# Altium PCB CH340T9R-R0.PcbDoc
Units mil, origin at the board's own origin, x right, y up, seen from the top; angles counter-clockwise.
Board outline 1551.27 x 575.04 mil, 2 copper layers (Top Layer, Bottom Layer); 14 components, 31 nets, 87 pads, 75 vias.
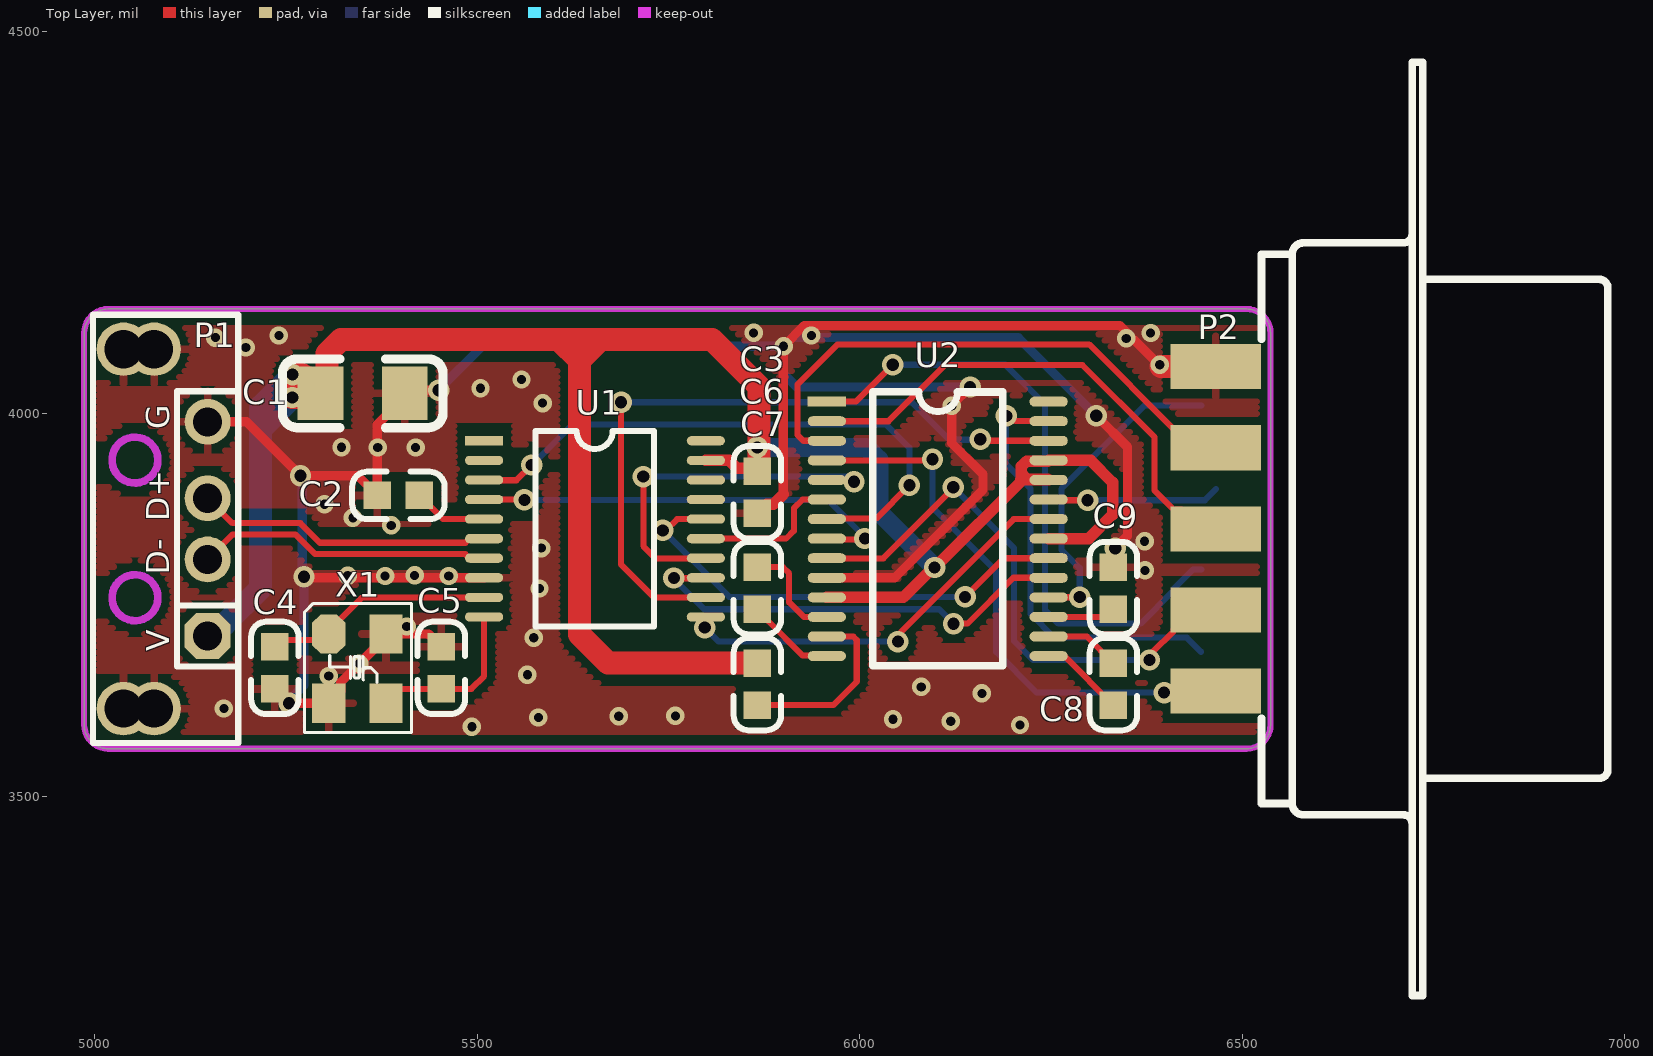
[diagram p0: Top Layer view]
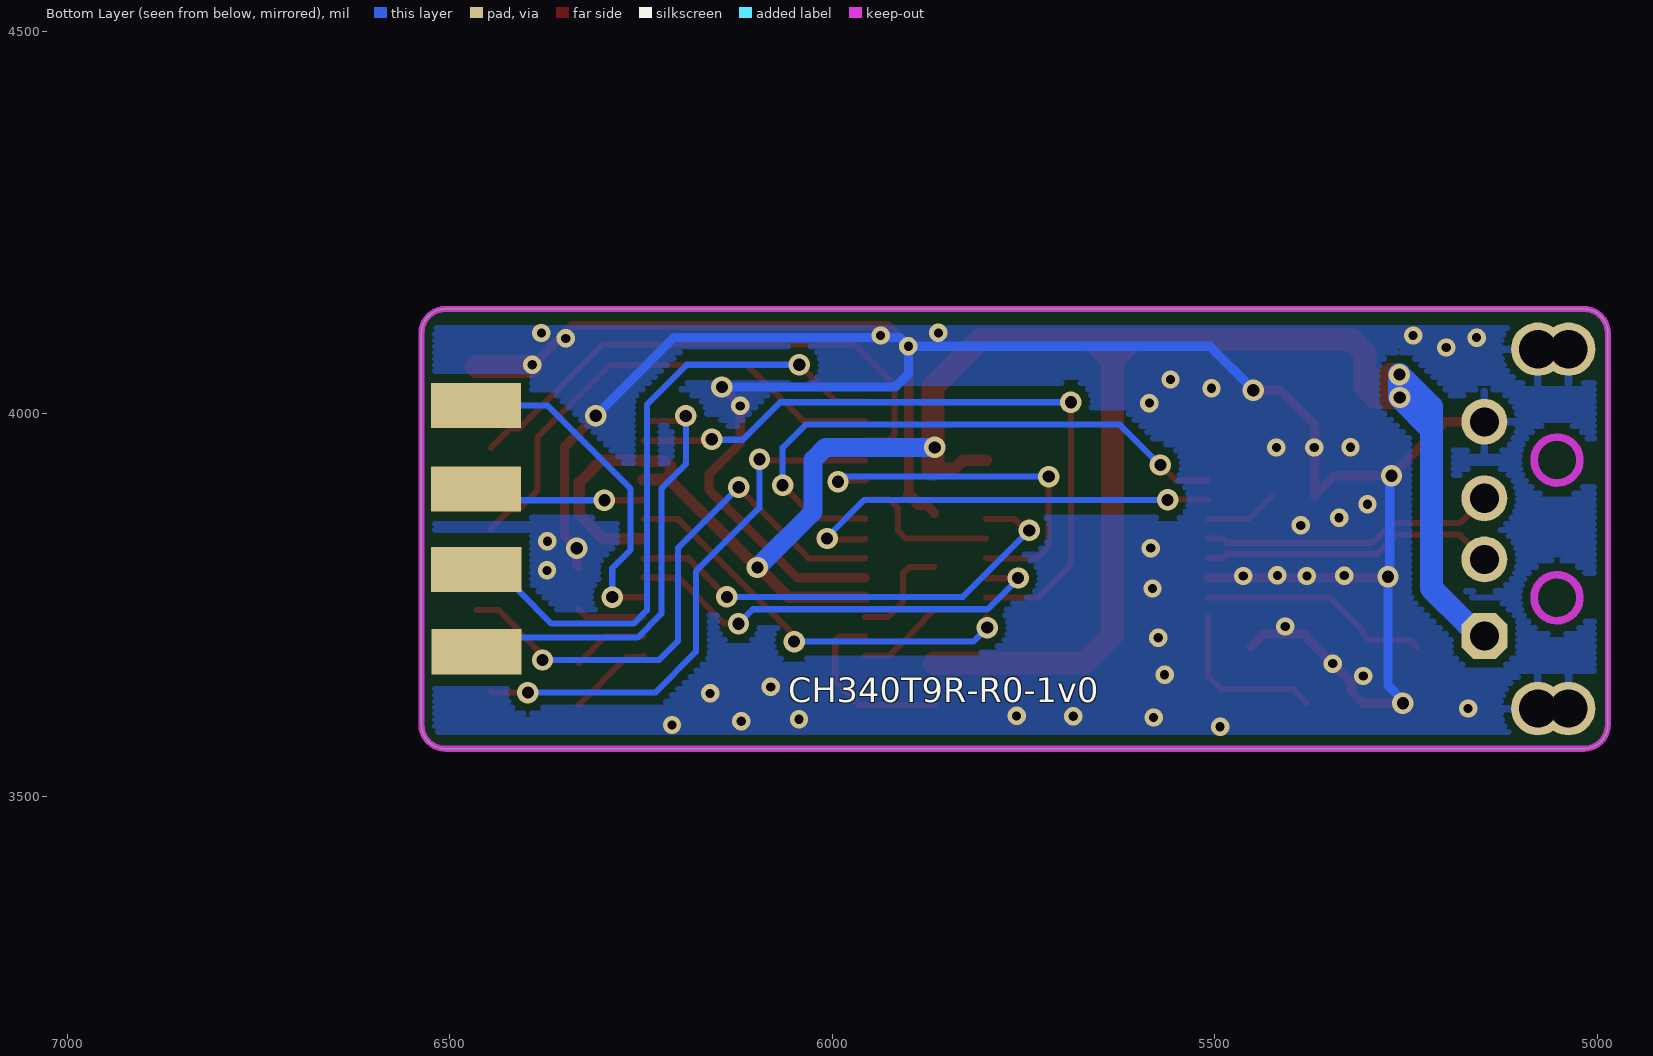
[diagram p1: Bottom Layer view, seen from below]

## Layer stack, top to bottom
Top Solder: solder mask 0.4, Solder Resist, Dk 3.5
Top Layer: signal copper 1.4
Dielectric 1: dielectric 12.6, FR-4, Dk 4.8
Bottom Layer: signal copper 1.4
Bottom Solder: solder mask 0.4, Solder Resist, Dk 3.5

## Board outline
4986,3593.5 ccw(c5017.5,3593.5) 5017.5,3562 6505.78,3562 ccw(c6505.78,3593.5) 6537.27,3593.5 6537.27,4105.54 ccw(c6505.78,4105.54) 6505.78,4137.04 5017.5,4137.04 ccw(c5017.5,4105.54) 4986,4105.54

## Design rules (kind name [scope] priority, off if disabled: settings)
Clearance Clearance_1 [InPolygon] p1: gap=10 ignorepadtopadclearanceinfootprint=FALSE
Clearance [All] p2: gap=6 ignorepadtopadclearanceinfootprint=FALSE
ComponentClearance [All] p1 off: gap=10 collisioncheckmode=3 verticalgap=10 showdistances=FALSE
DiffPairsRouting [All] p1: maxlimit=10 minlimit=7 mostfreqgap=8 toplayer_minwidth=6 toplayer_maxwidth=15 toplayer_prefwidth=8 bottomlayer_minwidth=6 bottomlayer_maxwidth=15 bottomlayer_prefwidth=8 maxuncoupledlength=500
MinimumSolderMaskSliver [All] p1 off: minsoldermaskwidth=10
PolygonConnect PolygonConnect_1 [IsVia] p1: connectstyle=Direct reliefconductorwidth=10 reliefentries=4 polygonreliefangle="90 Angle" airgapwidth=10
PolygonConnect [All] p2: connectstyle=Relief reliefconductorwidth=10 reliefentries=4 polygonreliefangle="90 Angle" airgapwidth=10
RoutingVias [All] p1: holewidth=16 width=28 viastyle="Through Hole" minholewidth=12 minwidth=24 maxholewidth=28 maxwidth=50
SilkToSilkClearance [All] p1 off: silktosilkclearance=10
SilkToSolderMaskClearance [IsPad] p1 off: minsilkscreentomaskgap=10 clearancetoexposedcopper=TRUE
SolderMaskExpansion [All] p1: expansion=4 istentingtop=FALSE
Width [All] p1: maxlimit=100 minlimit=6 preferedwidth=10
25 further rules are at their usual default settings.

## Classes and differential pairs
differential pair NewDifferentialPair1: +UD+ -UD-

## Components (designator, comment, footprint, x,y, rotation, side; value= is the part's Value field where it differs from the comment)
C1 "10uF" 3216_C 5295.21,4026.82 r180 top
C2 "0.1uF" 0603_C 5424.33,3893.24 r180 top
C3 "0.1uF" 0603_C 5866.25,3924.83 r270 top
C4 "33p" 0603_C 5235.41,3695.17 r270 top
C5 "33p" 0603_C 5453.14,3640.19 r90 top
C6 "0.1uF" 0603_C 5866.25,3799.43 r270 top
C7 "0.1uF" 0603_C 5866.25,3674.02 r270 top
C8 "0.1uF" 0603_C 6331.73,3674.02 r270 top
C9 "0.1uF" 0603_C 6331.73,3744.44 r90 top
P1 "USB" USBAM 5147.43,3709.52 r90 top
P2 "DB9" DB9-PAD-M 6465.11,3637.12 r180 top
U1 "CH340T" SSOP20 5508.91,3964.68 r270 top
U2 "MAX213/ADM213/SP213" SSOP28 5957.09,4015.86 r0 top
X1 "12MHz" XT3225 5305.82,3712.12 r270 top

## Footprints (in the part's own frame and the unit in brackets; to place one, negate y for a bottom-side part, rotate by r counter-clockwise, add the part's x,y. Pads: shape width x height; smd on the part's side, far side on the other; paste and mask are expansions set on the pad)
0603_C [mil]
  rect 36x36 smd: 1(0,0) 2(55,0)
  silkscreen extent -33,-31 88,31
3216_C [mil]
  rect 60x70 smd: 1(0,0) 2(-110,0)
  silkscreen extent -160,-45 50,45
DB9-PAD-M [mm]
  rect 3x1.5 smd: 1(-0.01,-0.005) 2(-0.01,-2.7) 3(-0.01,-5.395) 4(-0.01,-8.09) 5(-0.01,-10.785)
  rect 3x1.5 smd far side: 6(-0.002,-1.315) 7(-0.012,-4.05) 8(-0.02,-6.717) 9(-0.02,-9.493)
  silkscreen extent -13.03,-20.89 -1.53,10.11
SSOP20 [mil]
  rect 12x50 smd: 1(0,0)
  oval 12x50 smd: 2(25.6,0) 3(51.2,0) 4(76.8,0) 5(102.4,0) 6(128,0) 7(153.5,0) 8(179.1,0) 9(204.7,0) 10(230.3,0) 11(230.3,290) 12(204.7,290) 13(179.1,290) 14(153.5,290) 15(128,290) 16(102.4,290) 17(76.8,290) 18(51.2,290) 19(25.6,290) 20(0,290)
  silkscreen extent -13,67 243,222
SSOP28 [mil]
  rect 50x13 smd: 1(0,0)
  oval 50x13 smd: 2(0,-25.59) 3(0,-51.18) 4(0,-76.77) 5(0,-102.36) 6(0,-127.95) 7(0,-153.55) 8(0,-179.14) 9(0,-204.73) 10(0,-230.32) 11(0,-255.91) 12(0,-281.5) 13(0,-307.09) 14(0,-332.68) 15(290,-332.68) 16(290,-307.09) 17(290,-281.5) 18(290,-255.91) 19(290,-230.32) 20(290,-204.73) 21(290,-179.14) 22(290,-153.55) 23(290,-127.95) 24(290,-102.36) 25(290,-76.77) 26(290,-51.18) 27(290,-25.59) 28(290,0)
  silkscreen extent 60,-345 230,13
USBAM [mil]
  round 70 hole 50: 0(-95,70) 0(-95,110) 0(375,70) 0(375,110)
  oct 60x60 hole 38: 1(0,0)
  round 60 hole 38: 2(100,0) 3(180,0) 4(280,0)
  Keep-Out Layer circle w10: c50,95 r30
  Keep-Out Layer circle w10: c230,95 r30
  silkscreen extent -140,-40 420,150
XT3225 [mm]
  oct 1.3x1.1 smd: 1(0,0)
  rect 1.3x1.1 smd: 2(2.3,0) 3(2.3,1.9) 4(0,1.9)
  silkscreen extent -1.02,-0.8 3.27,2.74

## Part data
C1 C2 C3 C4 C5 C6 C7 C8 C9: library part CAP, "Capacitor"
U1: "USB to TTL Serial / UART,  USB to IrDA"
U2: library part MAX213
X1: library part CRYSTAL, "Crystal"

## Via types
v1: diameter 24, hole 12, Top Layer to Bottom Layer, 42 vias
v2: diameter 28, hole 16, Top Layer to Bottom Layer, 33 vias

## Nets (pads, with @x,y where several pads share a name; then routed paths per layer and width w, separated by ;. In a path a pad name is that pad's centre, name@x,y a point inside that pad or via, vN(x,y) a via of type N, cw(c..) or ccw(c..) an arc to the next point about the centre after c; other vN are vias at no path point)
ACT: U1.2
CTS: U1.11 U2.22 | length 543.2
  Top Layer w8: v2(5797.38,3720.48) 5797.38,3732.84 U1.11 ; v2(6049.98,3702.19) 6053.81,3706.01 6053.81,3714.57 6201.55,3862.31 U2.22
  Bottom Layer w8: v2(5797.38,3720.48) 5815.67,3702.19 v2(6049.98,3702.19)
DCD: U1.14 U2.5 | length 498.3
  Top Layer w8: v2(5717.12,3917.89) 5717.12,3826.91 5733.47,3810.56 5798.29,3810.56 U1.14 ; U2.5@5955.62,3913.94 5957.02,3912.54 5991.09,3912.54 v2(5992.63,3911)
  Bottom Layer w8: v2(5717.12,3917.89) 5989.11,3917.89 5989.11,3914.51 v2(5992.63,3911)
DSR: U1.12 U2.26 | length 921.4
  Top Layer w8: v2(5688,4015) 5688,3802.85 5730.88,3759.98 U1.12 ; v2(6157.82,3966.82) 6159.95,3964.68 U2.26
  Bottom Layer w8: v2(5688,4015) 6068.38,4015 6117.38,3966 6157,3966 v2(6157.82,3966.82)
DTR: U1.15 U2.6 | length 196.7
  Top Layer w8: U1.15 5903.68,3836.68 5913.97,3846.97 5913.97,3876.47 5925.4,3887.91 U2.6
GND: C1.2 C2.2 C3.2 C4.2 C5.2 C9.2 P1.0 P1.4 P2.5 U1.8 U2.10 X1.2 X1.4 | length 3941.5
  Top Layer w12: P1.4 5198.32,3989.52 v2(5268.89,3918.94) 5343.62,3918.94 C2.2 5369.33,3985.95 5414.04,4030.65 v2(5449.66,4030.65) ; v2(5254.02,3621.56) X1.2 5321.47,3637.22 5321.47,3649.03 5380.62,3708.18 X1.4 5436.21,3712.12 C5.2 ; v2(5273.49,3786.82) 5274.73,3785.58 U1.8 ; C3.2 C3.2@5878.25,3881.83 ; 5899.98,3894.49 v1@5899.98,4087.32 ; v1(5900.58,4088.37) 5927.76,4115.55 6340.02,4115.55 v1@6352.83,4102.74 ; U2.10 6045.94,3785.54 6161.26,3900.86 6161.26,3920.9 6120.5,3961.66 6120.5,4011.1 v2(6144.43,4035.02) ; v2(6309.48,3997.31) 6350.19,3956.6 6350.19,3840.39 6334.25,3824.44 v2(6334.25,3824.19) 6334.25,3801.96 C9.2 ; v1@6352.53,4102.44 6352.53,4097.85 6354.15,4096.22 6359.34,4096.22 v1@6393.84,4061.72
  Top Layer w15: C3.2@5878.25,3881.83 5887.33,3881.83 5899.98,3894.49
  Top Layer w30: v1@6393.84,4061.72 P2.5
  Bottom Layer w12: v2(5254.02,3621.56) 5254.02,3625.51 5273.49,3644.98 v2(5273.49,3786.82) 5271.19,3789.12 5271.19,3916.65 v2(5268.89,3918.94) ; v2(5449.66,4030.65) 5449.66,4031.74 5506.3,4088.37 v1(5900.58,4088.37) ; v2(6144.43,4035.02) 5917.53,4035.02 5900.58,4051.96 v1(5900.58,4088.37) ; v2(6309.48,3997.31) 6207.26,4099.53 5911.85,4099.53 5900.69,4088.37 v1(5900.58,4088.37)
  other v1: 5493,3590.8 6209.66,3593.1 6119.12,3597.92 6043.59,3600.6 5579.93,3602.89 5685,3604.4 5759.08,3604.94 5168.75,3614.63 6159.84,3634.35 6080.55,3642.92 5305.82,3657.15 5565.57,3658.83 5345.71,3673.27 5573.88,3707.2 5407.86,3721.91 5581.44,3771.45 5330.57,3788.39 5379.48,3787.86 5462.77,3787.86 5418.08,3788.66 6373.11,3795.17 5583.71,3824.36 6372.62,3833.43 5387.54,3854.11 5337.33,3864 5300.34,3881.68 5322.43,3956.26 5369.82,3955.9 5419.37,3955.9 6120.5,4010.35 5585.49,4013.92 5504.26,4033.44 5557.79,4044.77 6392.45,4064 5197.27,4086.66 6348.61,4098.52 5157.62,4099.57 5240.6,4102.34 5936.91,4102.41 5861.31,4105.72 6380.43,4105.69
NetC2_1: C2.1 U1.5 | length 97.4
  Top Layer w8: C2.1 5455.29,3862.28 U1.5
NetC4_1: C4.1 U1.9 X1.1 | length 302.7
  Top Layer w8: C4.1 5244.33,3704.09 5297.8,3704.09 X1.1 5305.82,3716.05 5349.74,3759.98 U1.9
NetC5_1: C5.1 U1.10 X1.3 | length 220.9
  Top Layer w8: X1.3 5380.62,3622.54 5398.27,3640.19 C5.1 5492.1,3640.19 5508.91,3657 U1.10
NetC6_1: C6.1 U2.12 | length 139.9
  Top Layer w8: C6.1 5899.71,3799.43 5907.77,3791.37 5907.77,3753.6 5927.01,3734.36 U2.12
NetC6_2: C6.2 U2.14 | length 117
  Top Layer w8: C6.2 5880.25,3730.43 5880.25,3729.05 5925.16,3684.13 5956.13,3684.13 U2.14
NetC7_2: C7.2 U2.13 | length 238.1
  Top Layer w8: C7.2 5965.49,3619.02 5996.19,3649.73 5996.19,3704.14 5991.56,3708.77 U2.13
NetC8_1: C8.1 U2.16 | length 99
  Top Layer w8: U2.16 6296.98,3708.77 C8.1
NetC8_2: C8.2 U2.15 | length 111.2
  Top Layer w8: U2.15 6248.05,3682.22 6268.53,3682.22 C8.2
NetC9_1: C9.1 U2.17 | length 88.8
  Top Layer w8: U2.17 6321.64,3734.36 C9.1
RI: U1.13 U2.19 | length 581.5
  Top Layer w8: v2@5757.11,3784.3 5757.74,3784.94 5798.27,3784.94 U1.13 ; v2(6122.73,3725.58) 6141.01,3725.58 6200.97,3785.54 U2.19
  Bottom Layer w8: v2@5757.11,3784.3 5796.93,3744.48 6103.83,3744.48 v2(6122.73,3725.58)
  other v2: 5757.11,3785.3
RS232_CTS: P2.8 U2.23 | length 225.2
  Top Layer w8: U2.23 6248,3887 v2(6298,3887)
  Bottom Layer w8: v2(6298,3887) 6451.32,3887 P2.8
RS232_DCD: P2.1 U2.4 | length 716
  Top Layer w8: U2.4 6093.88,3939.09 v2(6095.27,3940.47) ; v2(6398.1,3635.42) 6444.62,3635.42 P2.1@6446.51,3637.31
  Bottom Layer w8: v2(6095.27,3940.47) 6095.27,3877.08 6178.35,3794 6178.35,3688.6 6231.52,3635.42 v2(6398.1,3635.42)
RS232_DSR: P2.6 U2.27 | length 568.4
  Top Layer w8: v2(6191.55,3997.23) 6196.96,3997.23 6203.69,3990.5 6241.49,3990.5 U2.27@6241.83,3990.17
  Bottom Layer w8: v2(6191.55,3997.23) 6191.55,3934.25 6223.53,3902.26 6223.53,3738.59 6254.71,3707.41 6427.69,3707.41 P2.6@6446.21,3688.89
RS232_DTR: P2.4 U2.3 | length 712.9
  Top Layer w8: U2.3 5926.37,3964.68 5918.68,3972.37 5918.68,4038.03 5971.36,4090.71 6300.04,4090.71 6409.6,3981.15 6420.98,3981.15 P2.4@6446.51,3955.62
RS232_RI: P2.9 U2.18 | length 420.6
  Top Layer w8: U2.18 6247.26,3760.12 6287.61,3760.12 v2(6287.79,3760.3)
  Bottom Layer w8: v2(6287.79,3760.3) 6287.79,3798.18 6263.77,3822.2 6263.77,3901.85 6372.76,4010.84 P2.9@6446.9,4010.84
RS232_RTS: P2.7 U2.1 | length 837.9
  Top Layer w8: U2.1 5994.82,4015.86 v2(6043.13,4064.17)
  Bottom Layer w8: v2(6043.13,4064.17) 6190.37,4064.17 6242.52,4012.02 6242.52,3743.05 6259.91,3725.67 6367.23,3725.67 6410.55,3769 6410.55,3771.04 6436.08,3796.57 P2.7@6446.61,3796.57
RS232_RXD: P2.2 U2.9 | length 744.5
  Top Layer w8: U2.9 5957.38,3810.84 6030.77,3810.84 6122.52,3902.59 v2(6122.52,3903.78) ; v2(6379,3678) 6382.83,3681.83 6382.83,3688.16 6410.45,3715.79 6410.45,3717.89 6435.98,3743.42 P2.2
  Bottom Layer w8: v2(6122.52,3903.78) 6201.56,3824.74 6201.56,3703.23 6226.79,3678 v2(6379,3678)
RS232_TXD: P2.3 U2.2 | length 649.4
  Top Layer w8: U2.2 6037.61,3990.27 6110.95,4063.61 6291.37,4063.61 6385.54,3969.44 6385.54,3899.64 6410.13,3875.05 6420.98,3875.05 P2.3@6446.51,3849.52
RTS: U1.16 U2.20 | length 623.9
  Top Layer w8: v2(5742.59,3847.49) 5746.46,3847.49 5761.25,3862.28 U1.16 ; v2(6137.82,3760.6) 6188.35,3811.13 U2.20
  Bottom Layer w8: v2(5742.59,3847.49) 5829.48,3760.6 v2(6137.82,3760.6)
RXD: U1.4 U2.8 | length 569.6
  Top Layer w8: U1.4 5561.16,3887.88 v2(5561.61,3887.43) ; U2.8 5958.03,3835.78 6003.74,3835.78 v2@6006.84,3838.88
  Bottom Layer w8: v2(5561.61,3887.43) 5958.29,3887.43 v2@6006.84,3838.88
  other v2: 6006.84,3836.88
TNOW: U1.17
TXD: U1.3 U2.7 | length 774.5
  Top Layer w8: U1.3 5509.3,3913.08 5551.11,3913.08 v2(5571,3932.97) ; U2.7 5957.65,3862.88 6021.48,3862.88 v2(6065.06,3906.46)
  Bottom Layer w8: v2(5571,3932.97) 5623.91,3985.89 6034.89,3985.89 6065.06,3955.71 v2(6065.06,3906.46)
UD+: P1.3 U1.6 | length 387.7
  Top Layer w8: P1.3 5179.93,3857.02 5268.59,3857.02 5294.18,3831.43 5484.39,3831.43 5489.64,3836.68 U1.6
UD-: P1.2 U1.7 | length 387.7
  Top Layer w8: P1.2 5179.93,3842.02 5262.37,3842.02 5287.97,3816.43 5484.39,3816.43 5489.64,3811.18 U1.7
VCC: C1.1 C3.1 C7.1 P1.1 U1.19 U2.11 U2.21 U2.24 U2.25 | length 3167.4
  Top Layer w15: U1.19 5829.26,3939.08 5839.84,3928.5 C3.1@5871.58,3928.5 ; U2.11 6057.19,3759.95 6096.24,3799 v2(6098,3799) ; v2@6098.76,3801.89 6101.24,3801.89 6212.85,3913.5 ; 6213.63,3919.79 6218.92,3914.5 6246.09,3914.5 U2.24 6212.85,3913.5 ; U2.21 6299.26,3836.72 6330.69,3868.16 6330.69,3910.25 6301.86,3939.09 U2.25 6246.09,3938.09 6218.22,3938.09 6211.53,3931.4 6211.53,3914.68 6210.34,3913.5 6212.85,3913.5
  Top Layer w30: 5661.13,4096.93 5661.04,4096.93 ; C7.1 5671.15,3674.02 5633.9,3711.28 5633.9,4069.79 ; C3.1@5868.64,3927.23 5868.64,4035.38 5807.1,4096.93 5661.04,4096.93 ; C1.1 5295.21,4031.82 5280.21,4046.82 5275.21,4046.82 5270.79,4051.25 v2(5258.57,4051.25) 5258.57,4021.7 v2(5258.09,4021.23) 5289.61,4021.23 C1.1 ; C1.1 5303.42,4035.03 5303.42,4078.64 5321.71,4096.93 5606.75,4096.93 ; 5606.75,4096.93 5633.9,4096.93 ; 5606.75,4096.93 5633.9,4069.79 ; 5633.9,4069.79 5661.04,4096.93 ; 5633.9,4069.79 5633.9,4096.93 ; 5633.9,4096.93 5661.04,4096.93
  Bottom Layer w25: v2(5866,3956) 6009.09,3956 6025.13,3939.96 6025.13,3871.87 v2(6098,3799)
  Bottom Layer w30: P1.1 5153.64,3709.52 5168.64,3724.52 5169.23,3724.52 5216.74,3772.03 5216.74,3979.87 ; 5216.74,3979.87 5216.74,4009.42 v2(5258.57,4051.25) 5258.57,4021.7 v2(5258.09,4021.23) 5216.74,3979.87
pads on no net: U1.1 U1.18 U1.20 U2.28

## Polygon pours and split planes (outlines as drawn)
GND on Top Layer "GND_L" (hatched Horizontal grid 8 track 8, remove dead copper, pour order 0): 4984.04,4137.44 6535.94,4137.44 6535.94,3551.71 4980.11,3551.71
GND on Bottom Layer "GND_L" (hatched Horizontal grid 8 track 8, remove dead copper, pour order 1): 4984.04,4137.44 4984.04,3551.71 6535.94,3551.71 6535.94,4137.44

## Keep-outs
Keep-Out Layer:
  the board outline again, w8

## Silkscreen, mask and mechanical layers (free items; w line width, h text height)
Bottom Overlay:
  text "CH340T9R-R0-1v0" at 6057.4,3622.61 h32
Mechanical 1:
  the board outline again, w8

## Text inside footprints (layer, text, board x,y; h text height)
P1: Top Overlay "D-" at 5097.43,3789.52 h30 r90; Top Overlay "D+" at 5097.43,3859.52 h30 r90; Top Overlay "V" at 5097.43,3689.52 h30 r90; Top Overlay "G" at 5097.43,3979.52 h30 r90